# Altium PCB PCB4B4.PcbDoc
Units mm, origin at the board's own origin, x right, y up, seen from the top; angles counter-clockwise.
Board outline 66.42 x 80.14 mm, 2 copper layers (Top Layer, Bottom Layer); 59 components, 64 nets, 251 pads, 31 vias.
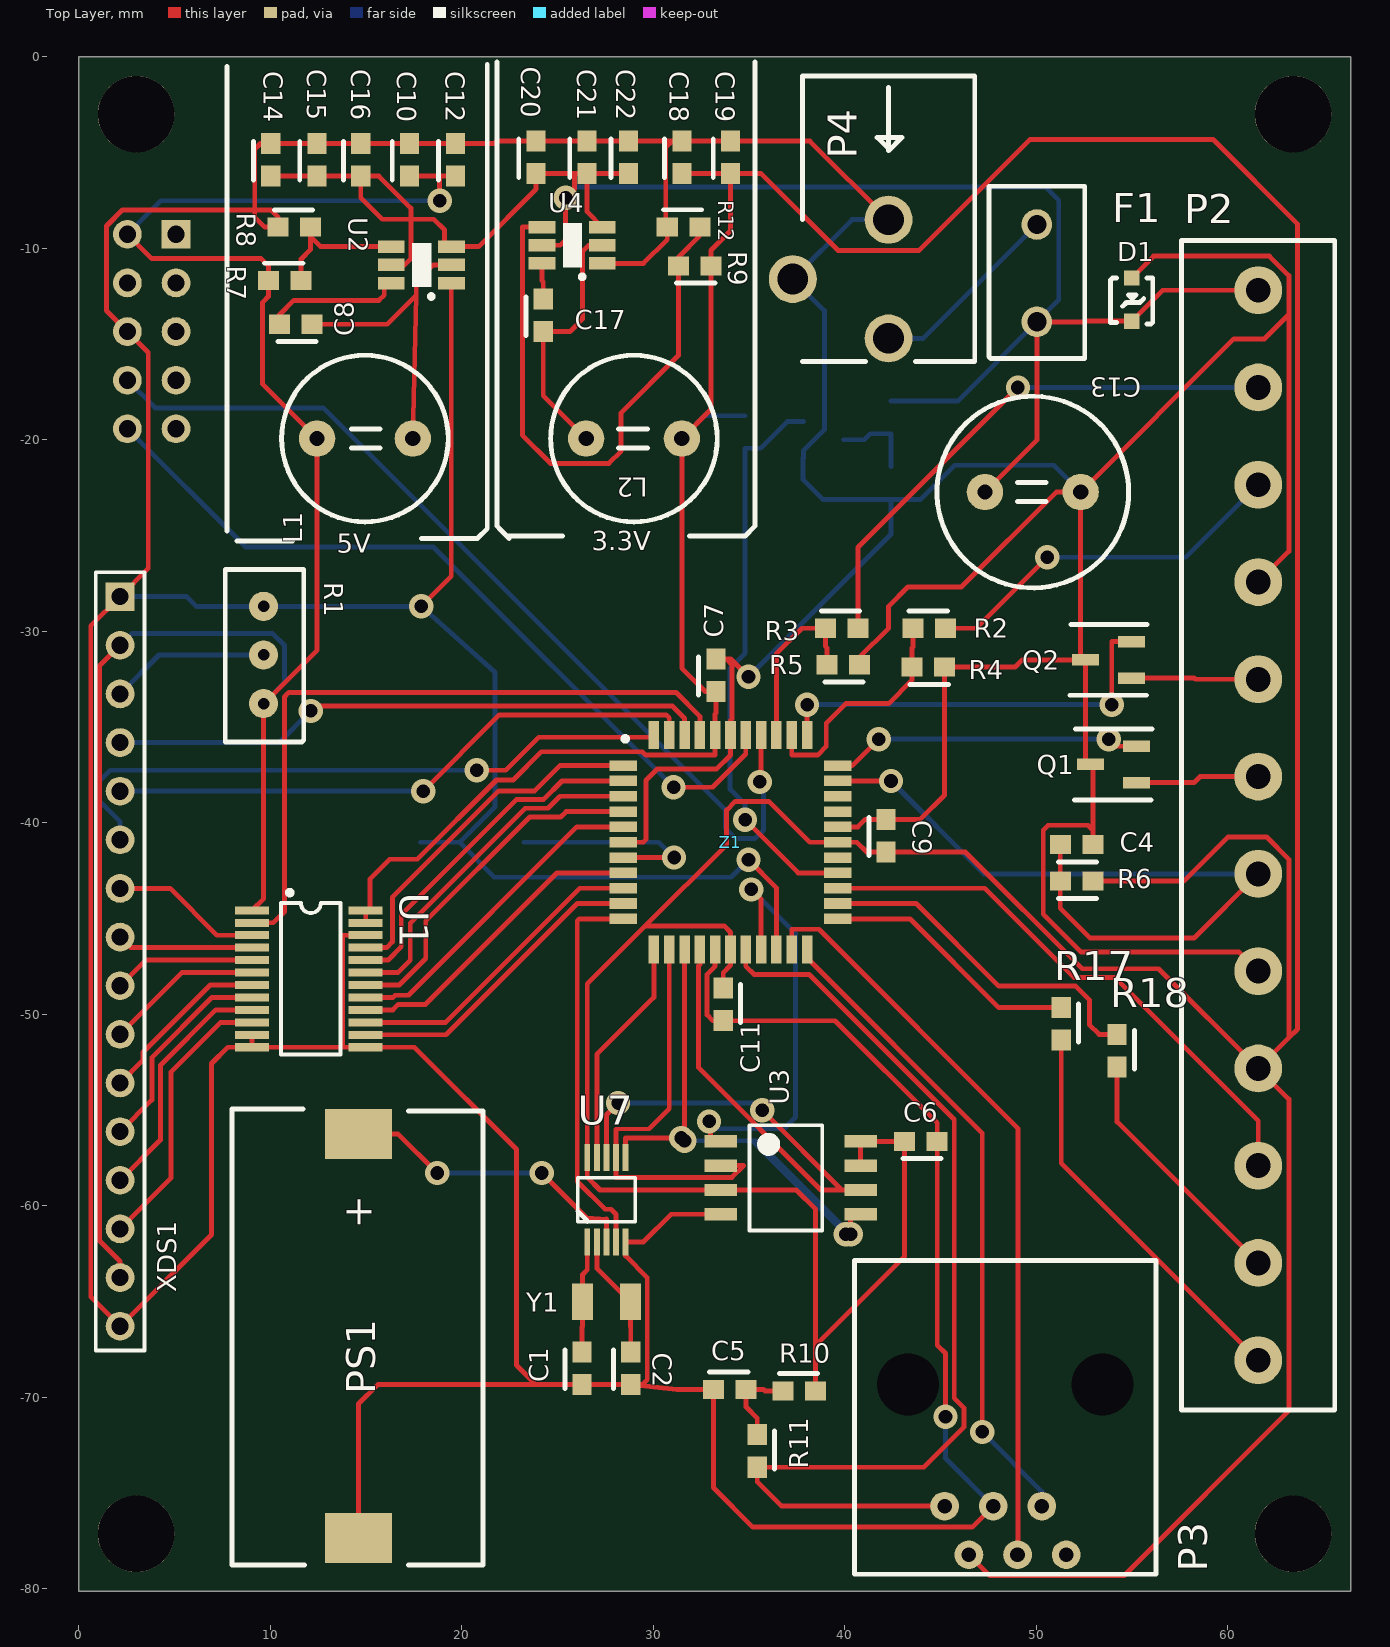
[diagram p0: Top Layer view]
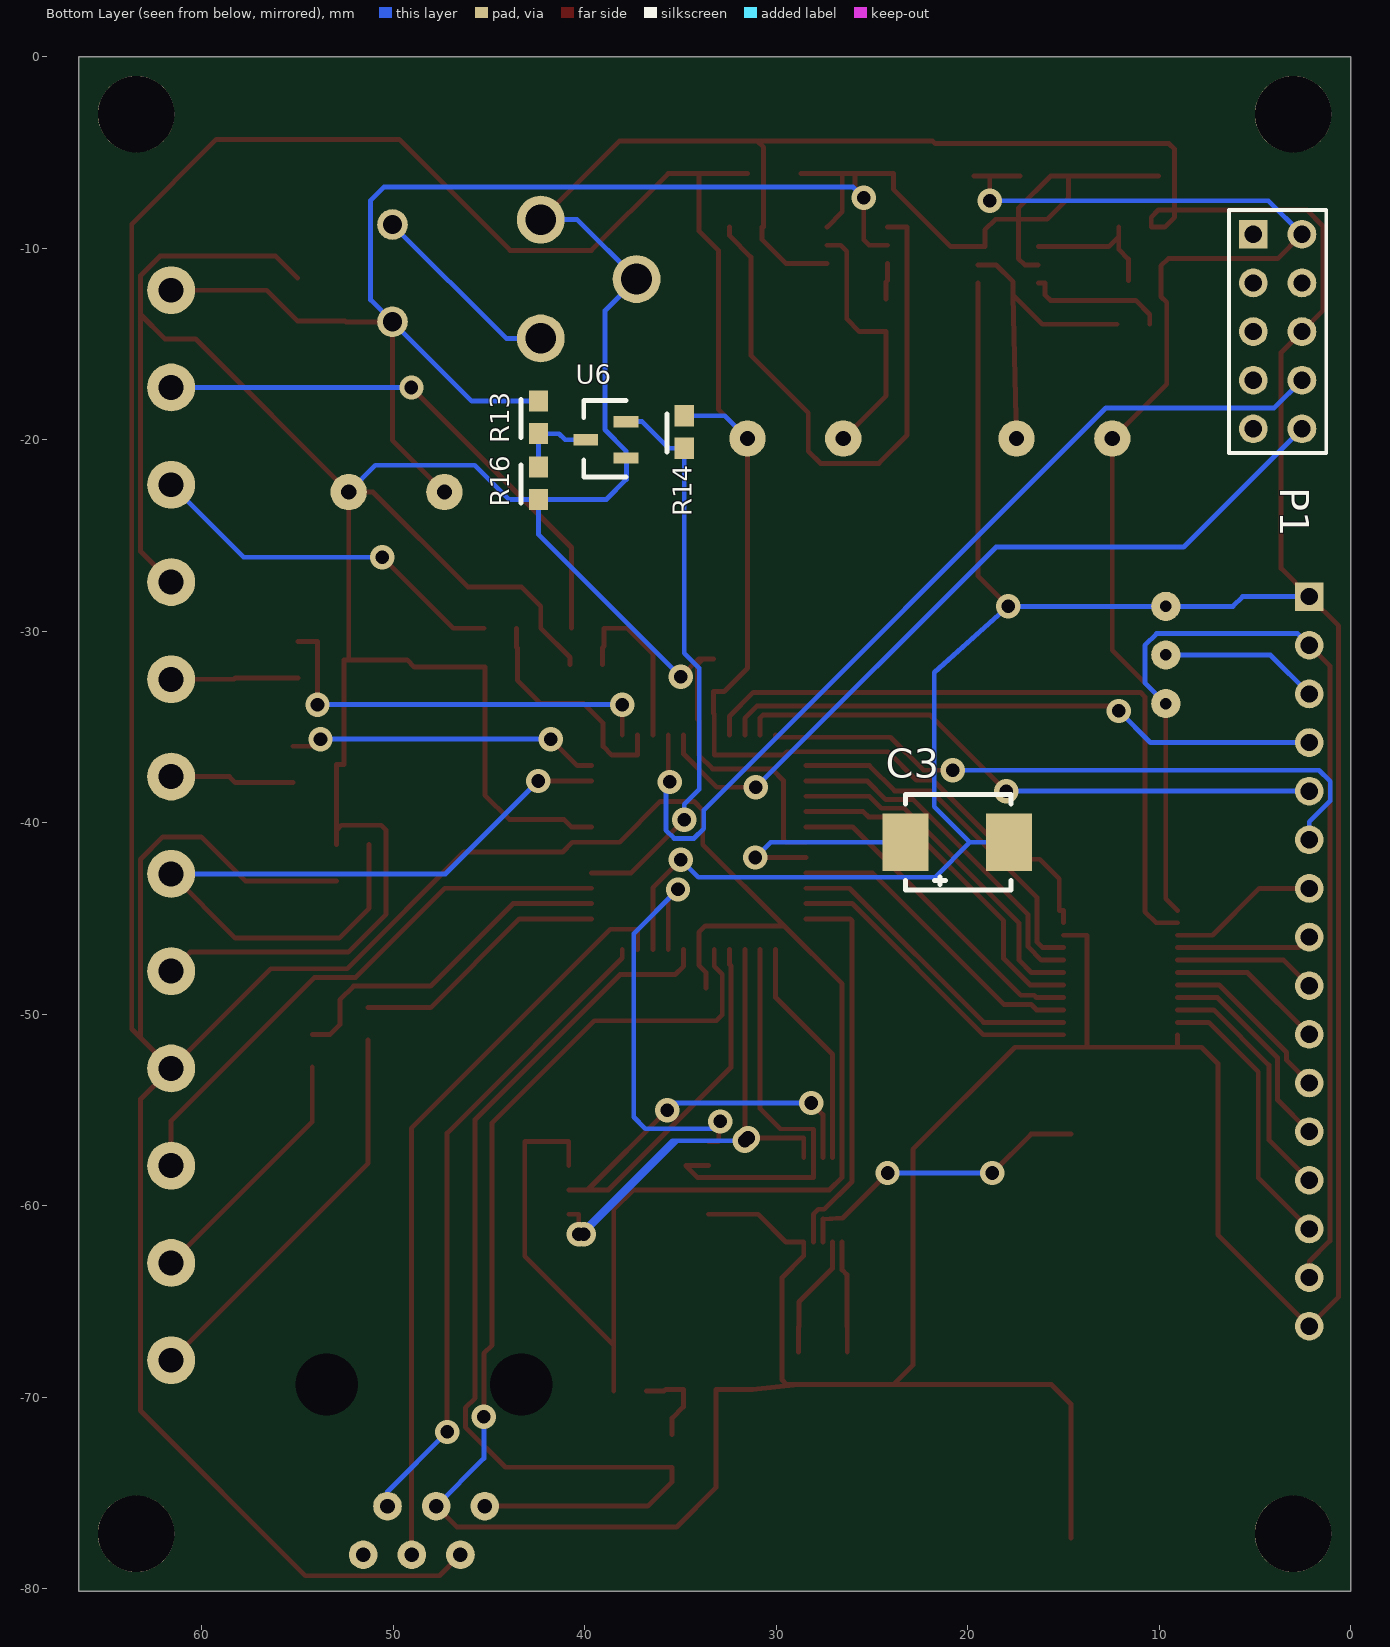
[diagram p1: Bottom Layer view, seen from below]

## Layer stack, top to bottom
Top Solder: solder mask 0.0102, Solder Resist, Dk 3.5
Top Layer: signal copper 0.0356
Dielectric 1: dielectric 0.32, FR-4, Dk 4.8
Bottom Layer: signal copper 0.0356
Bottom Solder: solder mask 0.0102, Solder Resist, Dk 3.5

## Board outline
0,-80.137 66.421,-80.137 66.421,0 0,0

## Design rules (kind name [scope] priority, off if disabled: settings)
Clearance [All] p1: gap=0.2
HoleSize [All] p1: absolutevalues=TRUE maxlimit=2.54 minlimit=0.2 maxpercent=80.000 minpercent=20.000
PolygonConnect [All] p1: connectstyle=Relief reliefconductorwidth=0.254 reliefentries=4 polygonreliefangle="90 Angle" airgapwidth=0.254
RoutingVias [All] p1: holewidth=0.711 width=1.27 viastyle="Through Hole" minholewidth=0.711 minwidth=1.27 maxholewidth=0.711 maxwidth=1.27
SilkToSilkClearance [All] p1: silktosilkclearance=0.1
SilkToSolderMaskClearance [IsPad] p1: minsilkscreentomaskgap=0.1 clearancetoexposedcopper=TRUE
SolderMaskExpansion [All] p1: expansion=0.102
UnpouredPolygon [All] p1: allowunpoured=FALSE
Width [All] p1: maxlimit=10 minlimit=0.254 preferedwidth=0.254
26 further rules are at their usual default settings.

## Classes and differential pairs
component class Ecran: R1 U1 XDS1
component class OTHER: P1 P2 Q1 Q2 R2 R3 R4 R5 R17 R18
component class PIC: C1 C2 C3 C4 C5 C6 C7 C9 C11 P3 R6 R10 R11 U3 U7 Y1 Z1
component class Power: 1 C8 C10 C12 C13 C14 C15 C16 C17 C18 C19 C20 C21 C22 D1 F1 L1 L2 P4 PS1 R7 R8 R9 R12 R13 R14 R16 U2 U4 U6
component class VRAIMENTHORSPCB: * B1 D4 DS1 MCL039PURGW P5
net class RG_LED[0..1]: RG_LED0 RG_LED1
net class S_D[0..7]: S_D0 S_D1 S_D2 S_D3 S_D4 S_D5 S_D6 S_D7

## Components (designator, comment, footprint, x,y, rotation, side; value= is the part's Value field where it differs from the comment)
C1 "18pF" 0603 26.289,-69.342 r90 top
C2 "18pF" 0603 28.829,-69.342 r90 top
C3 "10uF" C3 23.241,-41.021 r180 bottom
C4 "100nF" 0603 52.959,-41.148 r180 top
C5 "0.1uF" 0603 33.147,-69.596 r0 top
C6 "22uF" 0603 44.831,-56.642 r180 top
C7 "0.1uF" 0603 33.274,-33.147 r90 top
C8 "0.1uF" 0603 12.192,-13.97 r180 top
C9 "0.1uF" 0603 42.164,-41.529 r90 top
C10 "22uF" 0603 17.27,-6.231 r90 top
C11 "0.1uF" 0603 33.655,-48.641 r270 top
C12 "22uF" 0603 19.683,-6.231 r90 top
C13 "1000uF" Condo_trav 52.324,-22.733 r180 top
C14 "10uF" 0603 10.031,-6.231 r90 top
C15 "10uF" 0603 12.444,-6.231 r90 top
C16 "0.1uF" 0603 14.73,-6.231 r90 top
C17 "0.1uF" 0603 24.257,-14.351 r90 top
C18 "22uF" 0603 31.498,-6.104 r90 top
C19 "22uF" 0603 34.038,-6.104 r90 top
C20 "10uF" 0603 23.878,-6.104 r90 top
C21 "10uF" 0603 26.545,-6.104 r90 top
C22 "0.1uF" 0603 28.702,-6.104 r90 top
D1 "Diode 10TQ035" DiodeZin 54.991,-11.557 r270 top
F1 "Fuse 1" FUSIBLE 50.038,-8.763 r270 top
L1 "4.7uH" "Bobine Traversante 4.7" 12.446,-19.939 r0 top
L2 "3.3uH" "Bobine Traversante 4.7" 31.496,-19.939 r180 top
P1 "61304021121" HDR2X5 5.08,-9.271 r270 bottom
P2 "31101112" Bornier12 61.595,-68.072 r90 top
P3 "90512-001LF" RJ12 43.307,-69.342 r0 top
P4 "FC681465P" JackAlim 42.291,-8.509 r270 top
PS1 "Support Pile" Pile 14.605,-56.261 r270 top
Q1 "MOSFET-N" nouveau_mosfetN 52.832,-36.957 r90 top
Q2 "MOSFET-N" nouveau_mosfetN 52.578,-31.496 r90 top
R1 "20k" POTARD 9.652,-33.782 r90 top
R2 "300k" 0603 43.561,-29.845 r0 top
R3 "300k" 0603 38.989,-29.845 r0 top
R4 "100k" 0603 45.212,-31.877 r180 top
R5 "100k" 0603 40.767,-31.75 r180 top
R6 "330" 0603 52.959,-43.053 r180 top
R7 "54.9K" 0603 9.906,-11.684 r0 top
R8 "10K" 0603 10.412,-8.898 r0 top
R9 "33.2K" 0603 33.02,-10.922 r180 top
R10 "10K" 0603 36.781,-69.674 r0 top
R11 "1Ko" 0603 35.433,-71.96 r270 top
R12 "10K" 0603 30.734,-8.89 r0 top
R13 "300k" 0603 42.418,-19.685 r90 bottom
R14 "330" 0603 34.798,-20.447 r90 bottom
R16 "100k" 0603 42.418,-23.114 r90 bottom
R17 "60.4" 0603 51.308,-49.657 r270 top
R18 "75" 0603 54.229,-51.054 r270 top
U1 "74LVX4245MTCX" TRANS 14.986,-44.577 r270 top
U2 "TPS562201DDCT" TPS562201DDCT 17.016,-11.819 r90 top
U3 "SST25VF016B-50-4C-S2AF-T" FLASH 33.528,-56.642 r0 top
U4 "TPS562201DDCT" TPS562201DDCT 24.892,-10.795 r90 top
U6 "LM809M3-3.08/NOPB" LM809 37.846,-20.955 r0 bottom
U7 "MCP79510-I/MS" rtc 27.559,-59.69 r90 top
XDS1 "1-826629-6" HDR1X16 2.159,-28.194 r270 top
Y1 "32.768kHz" QUARTZ32KHz 27.559,-65.024 r0 top
Z1 "PIC32MX170F256D-I/PT" TQFP-44_L 34.036,-41.021 r0 top

## Footprints (in the part's own frame and the unit in brackets; to place one, negate y for a bottom-side part, rotate by r counter-clockwise, add the part's x,y. Pads: shape width x height; smd on the part's side, far side on the other; paste and mask are expansions set on the pad)
0603 [mm] "Chip Inductor, Body 0.6x0.3mm, IPC High Density"
  rect 1.1x1 smd: 1(0,0) 2(1.7,0)
  silkscreen extent -0.2,0.9 1.8,0.9
"Bobine Traversante 4.7" [mm]
  round 1.9 hole 0.8: 1(0,0) 2(5,0)
  silkscreen extent -1.85,-4.35 6.85,4.35
Bornier12 [mm]
  round 2.5 hole 1.3: 1(0,0) 2(5.08,0) 3(10.16,0) 4(15.24,0) 5(20.32,0) 6(25.4,0) 7(30.48,0) 8(35.56,0) 9(40.64,0) 10(45.72,0) 11(50.8,0) 12(55.88,0)
  silkscreen extent -2.6,-4 58.48,4
C3 [mm]
  rect 2.4x3 smd: 1(0,0) 2(5.4,0)
  silkscreen extent 0,-2.5 5.5,2.5
Condo_trav [mm]
  round 1.9 hole 0.8: 1(0,0) 2(5,0)
  silkscreen extent -2.5,-5 7.5,5
DiodeZin [mm]
  rect 0.8x0.8 smd: 1(2.25,0) 3(0,0)
  silkscreen extent 0,-1.1 2.4,1.1
FLASH [mm] "8-Pin Plastic Medium Body Small Outline Package 1.27 mm Pitch, IPC Medium Density"
  rect 1.7x0.65 smd: 1(0,0) 2(0,-1.27) 3(0,-2.54) 4(0,-3.81) 5(7.3,-3.81) 6(7.3,-2.54) 7(7.3,-1.27) 8(7.3,0)
  silkscreen extent 1.5,-4.66 5.3,0.85
FUSIBLE [mm]
  round 1.6 hole 1: 1(0,0) 2(5.08,0)
  silkscreen extent -2,-2.5 7,2.5
HDR1X16 [mm] "Connector; Header; 16 Position"
  rect 1.5x1.5 hole 0.9: 1(0,0)
  round 1.5 hole 0.9: 2(2.54,0) 3(5.08,0) 4(7.62,0) 5(10.16,0) 6(12.7,0) 7(15.24,0) 8(17.78,0) 9(20.32,0) 10(22.86,0) 11(25.4,0) 12(27.94,0) 13(30.48,0) 14(33.02,0) 15(35.56,0) 16(38.1,0)
  silkscreen extent -1.27,-1.27 39.37,1.27
HDR2X5 [mm] "Connector; Header; 5x2 Position"
  rect 1.5x1.5 hole 0.9: 1(0,0)
  round 1.5 hole 0.9: 2(0,2.54) 3(2.54,0) 4(2.54,2.54) 5(5.08,0) 6(5.08,2.54) 7(7.62,0) 8(7.62,2.54) 9(10.16,0) 10(10.16,2.54)
  silkscreen extent -1.27,-1.27 11.43,3.81
JackAlim [mm]
  round 2.5 hole 1.6: 1(6.2,0) 2(3.1,-5) 3(0,0)
  silkscreen extent -7.5,-4.5 7.4,4.5
LM809 [mm]
  rect 1.3x0.6 smd: 1(0,0) 2(0,-1.9) 3(2.1,-0.95)
  silkscreen extent 0,-3 2.2,1
nouveau_mosfetN [mm]
  rect 0.6x1.4 smd: 1(-0.95,-2.4) 2(0.95,-2.4) 3(0,0)
  silkscreen extent -1.85,-3.22 1.85,0.82
Pile [mm]
  rect 2.6x3.5 smd: 1(0,0) 2(21.1,0)
  silkscreen extent -1.3,-6.6 22.5,6.5
POTARD [mil]
  round 60 hole 23.62: 1(0,0) 2(100,0) 3(200,0)
  silkscreen extent -79,-83 276,79
QUARTZ32KHz [mm]
  rect 1.1x1.9 smd: 1(-1.25,0) 2(1.25,0)
RJ12 [mm]
  round 1.524 hole 3.25 unplated: 0(0,0) 0(10.16,0)
  round 1.5 hole 0.762: 1(1.91,-6.35) 2(3.18,-8.89) 3(4.45,-6.35) 4(5.72,-8.89) 5(6.99,-6.35) 6(8.26,-8.89)
  silkscreen extent -2.8,-9.91 12.96,6.47
rtc [mm]
  rect 1.4x0.3 smd: 1(-2.2,1) 2(-2.2,0.5) 3(-2.2,0) 4(-2.2,-0.5) 5(-2.2,-1) 6(2.2,-1) 7(2.2,-0.5) 8(2.2,0) 9(2.2,0.5) 10(2.2,1)
  silkscreen extent -1.15,-1.5 1.15,1.5
TPS562201DDCT [mm]
  rect 0.65x1.4 smd: 1(0,-2.45) 2(0.95,-2.45) 3(1.9,-2.45) 4(1.9,0.7) 5(0.95,0.7) 6(0,0.7)
  silkscreen extent -0.8,-1.5 2.1,-0.4
TQFP-44_L [mm] "44-Pin Thin Quad Flat Pack 0.8 mm Pitch, 1.0/0.1 mm Lead Form, IPC High Density"
  rect 1.45x0.55 smd: 1(-5.6,4) 2(-5.6,3.2) 3(-5.6,2.4) 4(-5.6,1.6) 5(-5.6,0.8) 6(-5.6,0) 7(-5.6,-0.8) 8(-5.6,-1.6) 9(-5.6,-2.4) 10(-5.6,-3.2) 11(-5.6,-4) 23(5.6,-4) 24(5.6,-3.2) 25(5.6,-2.4) 26(5.6,-1.6) 27(5.6,-0.8) 28(5.6,0) 29(5.6,0.8) 30(5.6,1.6) 31(5.6,2.4) 32(5.6,3.2) 33(5.6,4)
  rect 0.55x1.45 smd: 12(-4,-5.6) 13(-3.2,-5.6) 14(-2.4,-5.6) 15(-1.6,-5.6) 16(-0.8,-5.6) 17(0,-5.6) 18(0.8,-5.6) 19(1.6,-5.6) 20(2.4,-5.6) 21(3.2,-5.6) 22(4,-5.6) 34(4,5.6) 35(3.2,5.6) 36(2.4,5.6) 37(1.6,5.6) 38(0.8,5.6) 39(0,5.6) 40(-0.8,5.6) 41(-1.6,5.6) 42(-2.4,5.6) 43(-3.2,5.6) 44(-4,5.6)
  silkscreen extent -5.62,5.28 -5.37,5.52
TRANS [mm] "Shrink Small Outline; 24 Leads; Body Width 4.4 mm; Pitch 0.65 mm"
  rect 0.42x1.78 smd: 1(0,-5.94) 2(0.65,-5.94) 3(1.3,-5.94) 4(1.95,-5.94) 5(2.6,-5.94) 6(3.25,-5.94) 7(3.9,-5.94) 8(4.55,-5.94) 9(5.2,-5.94) 10(5.85,-5.94) 11(6.5,-5.94) 12(7.15,-5.94) 13(7.15,0) 14(6.5,0) 15(5.85,0) 16(5.2,0) 17(4.55,0) 18(3.9,0) 19(3.25,0) 20(2.6,0) 21(1.95,0) 22(1.3,0) 23(0.65,0) 24(0,0)
  silkscreen extent -1.05,-4.42 7.53,-1.31

## Part data
C1 C2 C4 C5 C7 C9 C11 C13: library part Cap, "Capacitor"
C3: library part "Cap Pol1"
C6: library part Cap, "Cout_Reg_3.3v"
C8 C10 C12 C14 C15 C16 C17 C18 C19 C20 C21 C22: library part Cap, "Reg_5v"
D1: "Diode Zenner"
F1: "Fuse"
L1: library part Inductor, "L_Reg_5v"
L2: library part Inductor, "L_Reg_3v"
P1: library part "Header 5X2", "Header, 5-Pin, Dual row"
P2: library part "Header 12", "Header, 12-Pin"
P3: library part "Header 6", "PortRJ12_debug"
P4: library part FC68148S, "Power connector"
PS1: library part SMTU-1225-1-LF
Q1 Q2: "N-Channel MOSFET"
R1: library part RPot, "Potentiometer"
R2 R3 R4 R5 R6 R7 R8 R9 R10 R11 R12 R13 R14 R16 R17 R18: library part Res2, "Resistor"
U1: "Bus Transceiver"
U2 U4: "Reg 12V-5V"
U3: library part Memoire, "FLASH"
U6: "Voltage Monitor"
U7: library part MCP79510, "RTC"
XDS1: library part "Header 16", "Header, 16-Pin"
Y1: library part XTAL, "Crystal Oscillator"
Z1: library part PIC32_1, "PIC"

## Free pads (board coordinates)
  round 4 hole 4: 3(3,-77.137) 3(3,-3) 3(63.421,-77.137) 3(63.421,-3)

## Via types
v1: diameter 1.27, hole 0.711, Top Layer to Bottom Layer, 31 vias

## Nets (pads, with @x,y where several pads share a name; then routed paths per layer and width w, separated by ;. In a path a pad name is that pad's centre, name@x,y a point inside that pad or via, vN(x,y) a via of type N, cw(c..) or ccw(c..) an arc to the next point about the centre after c; other vN are vias at no path point)
5VDC: C10.1 C12.1 L1.1 P1.2 R1.1 R7.1 U1.1 XDS1.2 XDS1.15 | length 111.7
  Top Layer w0.254: XDS1.15 2.159,-62.916 1.082,-61.839 1.082,-31.811 XDS1.2 ; P1.2 3.81,-10.541 9.525,-10.541 9.906,-10.922 R7.1 9.906,-12.522 9.601,-12.827 9.601,-17.094 L1.1 12.446,-30.988 R1.1 9.652,-43.971 U1.1 ; C10.1 18.847,-6.231 ; v1(18.847,-7.518) 18.847,-6.231 ; C12.1 18.847,-6.231
  Bottom Layer w0.254: XDS1.2 2.769,-30.124 10.135,-30.124 10.744,-30.734 10.744,-32.69 R1.1 ; P1.2 4.293,-7.518 v1(18.847,-7.518)
12VDC: C13.2 C14.1 C15.1 C16.1 C20.1 C21.1 C22.1 D1.1 F1.2 P2.12 R13.2 U2.3 U2.5 U4.3 U4.5 | length 103.4
  Top Layer w0.254: C14.1 C15.1 C16.1 ; U2.5 17.018,-10.869 17.348,-10.539 17.348,-8.485 ; U4.5 25.146,-9.845 25.425,-9.566 v1(25.425,-7.366) 25.883,-6.909 25.883,-6.104 ; U4.3 26.545,-8.098 C21.1 ; C22.1 C21.1 ; C13.2 50.038,-20.019 F1.2 52.476,-13.843 52.512,-13.807 D1.1 56.606,-12.192 P2.12 ; C16.1 14.73,-7.366 15.849,-8.485 17.348,-8.485 ; C16.1 15.672,-6.231 17.348,-7.907 17.348,-8.485 ; 17.348,-8.485 18.542,-8.485 19.101,-9.044 19.101,-9.919 U2.3 20.879,-9.919 23.878,-6.92 C20.1 25.883,-6.104 ; 25.883,-6.104 C21.1
  Bottom Layer w0.254: v1(25.425,-7.366) 25.984,-6.807 50.495,-6.807 51.181,-7.493 51.181,-12.7 F1.2 45.896,-17.985 R13.2
CMD_SERVO: P2.3 Z1.25 | length 29.3
  Top Layer w0.254: Z1.25 47.307,-43.421 51.965,-48.079 54.102,-48.079 61.595,-55.572 P2.3
CR_DATA0_3V: R2.1 R4.2 Z1.35 | length 12.4
  Top Layer w0.254: Z1.35 37.236,-36.474 38.583,-36.474 39.04,-36.017 39.04,-34.798 40.056,-33.782 42.291,-33.782 43.512,-32.561 R4.2 43.512,-30.886 43.561,-30.837 R2.1
CR_DATA0_12V: P2.10 R2.2 | length 19.4
  Top Layer w0.254: R2.2 46.863,-29.845 v1(50.571,-26.137)
  Bottom Layer w0.254: v1(50.571,-26.137) 57.81,-26.137 P2.10
CR_DATA1_3V: R3.1 R5.2 Z1.36 | length 9.3
  Top Layer w0.254: Z1.36 36.436,-31.179 37.77,-29.845 R3.1 38.989,-30.783 39.067,-30.861 R5.2
CR_DATA1_12V: P2.11 R3.2 | length 28.6
  Top Layer w0.254: R3.2 40.689,-25.63 v1(49.047,-17.272)
  Bottom Layer w0.254: v1(49.047,-17.272) P2.11
CR_LED_G: Q2.2 Z1.34 | length 21.8
  Top Layer w0.254: Z1.34 v1(38.036,-33.833) ; v1(53.95,-33.833) 53.95,-30.546 Q2.2
  Bottom Layer w0.254: v1(38.036,-33.833) v1(53.95,-33.833)
CR_LED_G_CTRL: P2.8 Q2.1 | length 6.6
  Top Layer w0.254: Q2.1 58.242,-32.446 58.308,-32.512 P2.8
CR_LED_R: Q1.2 Z1.33 | length 16.3
  Top Layer w0.254: Z1.33 40.386,-37.021 v1(41.771,-35.636) ; v1(53.797,-35.636) 54.168,-36.007 Q1.2
  Bottom Layer w0.254: v1(41.771,-35.636) v1(53.797,-35.636)
CR_LED_R_CTRL: P2.7 Q1.1 | length 6.5
  Top Layer w0.254: Q1.1 58.242,-37.907 58.557,-37.592 P2.7
FLSH_CE: U3.1 Z1.19 | length 22.7
  Top Layer w0.254: v1(32.918,-55.601) 32.995,-55.677 32.995,-56.642 U3.1 ; v1(35.128,-43.485) 35.636,-43.993 Z1.19
  Bottom Layer w0.254: v1(32.918,-55.601) 32.918,-55.626 33.274,-55.982 36.83,-55.982 37.44,-55.372 37.44,-45.796 v1(35.128,-43.485)
GND: C1.1 C2.1 C3.2 C4.1 C5.1 C6.1 C7.2 C9.2 C10.2 C11.2 C12.2 C13.1 C14.2 C15.2 C16.2 C18.2 C19.2 C20.2 C21.2 C22.2 D1.3 P1.6 P2.5 P2.9 P3.3 P4.2 P4.3 PS1.2 Q1.3 Q2.3 R1.3 R4.1 R5.1 R8.1 R12.1 R16.1 U1.11 U1.12 U1.13 U1.22 U2.1 U3.4 U4.1 U6.1 U7.5 XDS1.1 XDS1.16 Z1.6 Z1.16 Z1.20 Z1.29 Z1.39 | length 525
  Top Layer w0.254: U1.11 U1.12 ; PS1.2 14.605,-70.358 15.621,-69.342 23.876,-69.342 ; U1.22 13.767,-45.877 13.767,-51.727 ; v1(17.882,-28.702) 19.456,-27.127 19.456,-11.819 U2.1 ; U4.1 29.489,-10.795 30.734,-9.55 R12.1 30.658,-8.89 30.658,-4.734 30.988,-4.404 ; Z1.6 29.489,-41.021 29.62,-40.891 29.62,-37.795 30.226,-37.189 33.322,-37.189 34.036,-36.474 Z1.39 34.036,-34.671 34.112,-34.595 34.112,-31.75 33.809,-31.447 ; U7.5 U7.5@28.559,-61.9 ; Z1.16 33.236,-47.498 32.817,-47.917 32.817,-50.038 33.12,-50.341 C11.2 39.495,-50.341 44.831,-55.677 C6.1 44.831,-67.285 45.263,-67.716 v1(45.263,-71.018) ; C7.2 33.809,-31.447 ; U3.4 30.937,-60.452 29.489,-61.9 U7.5@28.559,-61.9 ; v1(34.975,-41.935) 36.436,-43.396 Z1.20 ; v1(34.976,-32.385) 34.038,-31.447 33.809,-31.447 ; Z1.29 40.691,-40.221 41.083,-39.829 C9.2 43.942,-39.829 45.212,-38.559 R4.1 48.895,-31.877 49.276,-31.496 Q2.3@52.324,-31.496 ; R5.1 40.767,-31.369 42.291,-29.845 42.291,-28.702 43.307,-27.686 46.101,-27.686 51.054,-22.733 C13.1 ; P4.3 38.186,-4.404 C19.2 C18.2 30.988,-4.404 ; P3.3 46.665,-76.784 35.204,-76.784 33.147,-74.727 C5.1 31.242,-69.596 C2.1 ; C4.1 52.959,-40.386 ; D1.3 56.134,-10.414 62.179,-10.414 63.195,-11.43 63.195,-13.462 ; P2.5 60.604,-46.761 52.349,-46.761 50.368,-44.78 50.368,-40.386 50.622,-40.132 52.705,-40.132 52.959,-40.386 ; P2.9 63.195,-25.832 63.195,-13.462 ; U1.12 13.767,-51.727 ; U1.12 7.785,-51.727 6.934,-52.578 6.934,-61.519 XDS1.16 0.628,-64.763 0.628,-29.725 XDS1.1 3.632,-26.721 3.632,-15.443 P1.6 1.448,-13.259 1.448,-8.839 2.286,-8.001 9.195,-8.001 ; 9.195,-8.001 10.031,-8.001 10.412,-8.382 R8.1 9.711,-8.898 9.195,-8.382 9.195,-8.001 ; 9.195,-8.001 9.195,-4.826 9.49,-4.531 C14.2 C15.2 C16.2 C10.2 C12.2 21.692,-4.531 21.819,-4.404 C20.2 C21.2 C22.2 30.988,-4.404 ; 13.767,-51.727 U1.13 17.526,-51.727 22.86,-57.061 22.86,-68.326 23.876,-69.342 ; 23.876,-69.342 C1.1 C2.1 ; U7.5@28.559,-61.9 28.559,-62.62 29.693,-63.754 29.693,-69.088 29.439,-69.342 C2.1 ; Q2.3@52.324,-31.496 C13.1 ; Q2.3@52.324,-31.496 Q2.3 52.578,-36.957 Q1.3 52.959,-36.957 52.959,-40.386 ; C13.1 60.325,-14.732 61.925,-14.732 63.195,-13.462
  Bottom Layer w0.254: XDS1.1 5.639,-28.194 6.147,-28.702 R1.3 v1(17.882,-28.702) 21.742,-32.156 21.742,-39.167 19.888,-41.021 ; C3.2 19.888,-41.021 ; v1(34.975,-41.935) 34.061,-42.85 21.692,-42.85 19.888,-41.021 ; v1(34.976,-32.385) 42.418,-24.943 R16.1 ; P4.3 40.391,-8.509 P4.2 38.938,-13.256 38.938,-19.482 37.846,-20.574 U6.1 37.821,-20.955 37.821,-22.073 38.862,-23.114 R16.1 ; v1(45.263,-71.018) 45.263,-73.198 P3.3 ; C13.1 50.927,-21.336 45.745,-21.336 43.967,-23.114 R16.1
MCLR: P3.1 R11.2 Z1.18 | length 54.1
  Top Layer w0.254: Z1.18 34.836,-47.498 35.268,-47.93 38.151,-47.93 45.72,-55.499 45.72,-70.056 46.228,-70.564 46.228,-71.566 44.135,-73.66 R11.2 35.433,-74.422 36.703,-75.692 P3.1
NetC3_1: C3.1 Z1.7 | length 10.8
  Top Layer w0.254: Z1.7 v1(31.09,-41.821)
  Bottom Layer w0.254: C3.1 30.29,-41.021 v1(31.09,-41.821)
NetC5_2: C5.2 R10.1 R11.1 | length 4.6
  Top Layer w0.254: R11.1 35.433,-71.095 34.847,-70.509 C5.2 35.763,-69.596 35.841,-69.674 R10.1
NetC8_1: C8.1 L1.2 U2.2 | length 16.5
  Top Layer w0.254: C8.1 16.104,-13.97 17.628,-12.446 ; L1.2 17.628,-12.446 ; U2.2 18.519,-10.869 17.628,-11.76 17.628,-12.446
NetC8_2: C8.2 U2.6 | length 7.4
  Top Layer w0.254: C8.2 10.492,-13.462 11.229,-12.725 15.672,-12.725 15.951,-12.446 15.951,-11.819 U2.6
NetC17_1: C17.1 L2.2 U4.2 | length 13.5
  Top Layer w0.254: L2.2 24.257,-17.7 C17.1 25.654,-14.351 26.314,-13.691 26.314,-10.16 26.629,-9.845 U4.2
NetC17_2: C17.2 U4.6 | length 1.9
  Top Layer w0.254: U4.6 24.192,-11.695 24.257,-11.76 C17.2
NetF1_1: F1.1 P4.1 | length 10.2
  Bottom Layer w0.254: P4.1 44.092,-14.709 F1.1
NetP2_1: P2.1 R17.2 | length 21
  Top Layer w0.254: R17.2 51.308,-57.785 P2.1
NetP2_2: P2.2 R18.2 | length 13.3
  Top Layer w0.254: R18.2 54.229,-55.626 P2.2
NetR7_2: R7.2 R8.2 U2.4 | length 7.4
  Top Layer w0.254: R7.2 11.606,-10.566 12.112,-10.06 12.112,-9.398 ; R8.2 12.112,-9.398 ; U2.4 12.633,-9.919 12.112,-9.398
NetR9_2: R9.2 R12.2 U4.4 | length 31.3
  Top Layer w0.254: U4.4 23.165,-8.895 23.165,-19.761 24.638,-21.234 27.686,-21.234 28.321,-20.599 28.321,-18.595 31.32,-15.596 R9.2 31.32,-10.465 32.434,-9.351 R12.2
PGEC1: P3.5 Z1.22 | length 34.1
  Top Layer w0.254: Z1.22 38.036,-47.066 47.183,-56.213 v1(47.183,-71.816)
  Bottom Layer w0.254: v1(47.183,-71.816) 50.297,-74.93 P3.5
PGED1: P3.4 Z1.21 | length 39.5
  Top Layer w0.254: Z1.21 37.236,-45.568 38.659,-45.568 49.047,-55.956 49.047,-78.232 P3.4
PIC_RASPI_RXD: P1.8 Z1.37 | length 49
  Top Layer w0.254: v1(35.56,-37.871) 35.636,-37.795 Z1.37
  Bottom Layer w0.254: P1.8 3.988,-18.339 12.776,-18.339 33.782,-39.345 33.782,-40.31 34.29,-40.818 35.328,-40.818 35.76,-40.386 35.76,-38.071 v1(35.56,-37.871)
PIC_RASPI_TXD: P1.10 Z1.38 | length 41.8
  Top Layer w0.254: v1(31.064,-38.151) 33.096,-38.151 34.836,-36.411 Z1.38
  Bottom Layer w0.254: P1.10 8.712,-25.603 18.517,-25.603 v1(31.064,-38.151)
POT_CONTRASTE: R1.2 XDS1.3 | length 8.3
  Bottom Layer w0.254: XDS1.3 4.191,-31.242 R1.2
POWEROK: R14.1 U6.2 Z1.26 | length 29.7
  Top Layer w0.254: v1(34.798,-39.852) 37.567,-42.621 Z1.26
  Bottom Layer w0.254: v1(34.798,-39.852) 34.798,-39.044 34.014,-38.26 34.014,-31.931 34.798,-31.147 R14.1 35.611,-20.447 37.003,-19.055 U6.2
RG_LED0: R17.1 Z1.23 | length 13.6
  Top Layer w0.254: Z1.23 43.409,-45.021 48.045,-49.657 R17.1
RG_LED1: R18.1 Z1.24 | length 18.2
  Top Layer w0.254: Z1.24 43.738,-44.221 48.05,-48.533 52.07,-48.533 52.781,-49.244 52.781,-50.546 53.289,-51.054 R18.1
RTC_CS: U7.4 Z1.11 | length 20.2
  Top Layer w0.254: U7.4 28.059,-60.452 27.798,-60.191 27.485,-60.191 26.035,-58.74 26.035,-45.123 26.137,-45.021 Z1.11
RTC_MFP: U7.9 Z1.12 | length 12.1
  Top Layer w0.254: U7.9 27.059,-52.101 30.036,-49.124 Z1.12
S_D0: U1.21 Z1.1 | length 18.8
  Top Layer w0.254: U1.21 16.084,-46.527 16.383,-46.228 16.383,-43.891 21.935,-38.339 23.813,-38.339 25.13,-37.021 Z1.1
S_D1: U1.20 Z1.2 | length 18.3
  Top Layer w0.254: U1.20 16.149,-47.177 16.844,-46.482 16.844,-44.799 22.85,-38.793 24.267,-38.793 25.238,-37.821 Z1.2
S_D2: U1.19 Z1.3 | length 18.4
  Top Layer w0.254: U1.19 16.665,-47.827 17.314,-47.178 17.314,-45.246 23.313,-39.247 24.507,-39.247 25.132,-38.621 Z1.3
S_D3: U1.18 Z1.4 | length 18.4
  Top Layer w0.254: U1.18 16.739,-48.477 18.123,-47.093 18.123,-45.127 23.55,-39.701 25.175,-39.701 25.454,-39.421 Z1.4
S_D4: U1.17 Z1.5 | length 17.1
  Top Layer w0.254: U1.17 16.408,-49.127 16.523,-49.012 17.221,-49.012 26.012,-40.221 Z1.5
S_D5: U1.16 Z1.8 | length 16.4
  Top Layer w0.254: U1.16 16.402,-49.777 16.691,-49.488 18.109,-49.488 24.976,-42.621 Z1.8
S_D6: U1.15 Z1.9 | length 16.4
  Top Layer w0.254: U1.15 19.164,-50.427 26.17,-43.421 Z1.9
S_D7: U1.14 Z1.10 | length 16.3
  Top Layer w0.254: U1.14 19.178,-51.077 26.034,-44.221 Z1.10
S_E: XDS1.6 Z1.44 | length 33.5
  Top Layer w0.254: v1(20.777,-37.262) 22.301,-37.262 24.028,-35.535 30.036,-35.535 Z1.44
  Bottom Layer w0.254: XDS1.6 2.159,-39.954 1.067,-38.862 1.067,-37.846 1.651,-37.262 v1(20.777,-37.262)
S_RS: XDS1.4 Z1.42 | length 31.4
  Top Layer w0.254: v1(12.116,-34.163) 12.364,-33.915 31.007,-33.915 31.636,-34.544 Z1.42
  Bottom Layer w0.254: XDS1.4 10.465,-35.814 v1(12.116,-34.163)
S_RW: XDS1.5 Z1.43 | length 31.3
  Top Layer w0.254: v1(17.983,-38.354) 21.968,-34.369 30.683,-34.369 30.836,-34.522 Z1.43
  Bottom Layer w0.254: XDS1.5 v1(17.983,-38.354)
SPI_SCK: U3.6 U7.8 Z1.15 | length 34
  Top Layer w0.254: U7.8 27.559,-55.245 v1(28.165,-54.639) ; Z1.15 32.436,-47.396 32.36,-47.473 32.36,-52.781 38.76,-59.182 39.853,-59.182 ; v1(35.687,-55.016) 39.853,-59.182 ; U3.6 39.853,-59.182
  Bottom Layer w0.254: v1(28.165,-54.639) 35.309,-54.639 v1(35.687,-55.016)
SPI_SI: U3.2 U7.7 Z1.13 | length 22.1
  Top Layer w0.254: Z1.13 30.836,-54.94 29.794,-55.982 28.059,-56.013 U7.7 28.059,-58.522 34.112,-58.522 34.722,-57.912 U3.2
SPI_SO: U3.5 U7.6 Z1.14 | length 33.7
  Top Layer w0.254: U7.6 28.559,-56.464 v1(31.471,-56.464) ; v1(31.636,-56.607) Z1.14 ; v1(40.056,-61.493) v1@40.31,-61.239 ; v1(40.31,-61.493) v1@40.31,-61.239 ; U3.5 40.31,-60.452 v1@40.31,-61.239
  Bottom Layer w0.254: v1(31.471,-56.464) 31.613,-56.607 v1(31.636,-56.607) 35.169,-56.607 ; v1(40.056,-61.493) 35.169,-56.607 ; v1(40.31,-61.493) 35.423,-56.607 35.169,-56.607
STATUS_BTN: C4.2 P2.6 R6.2 Z1.32 | length 39.7
  Top Layer w0.254: Z1.32 v1(42.418,-37.821) ; C4.2 R6.2 51.259,-44.47 52.814,-46.025 58.242,-46.025 P2.6
  Bottom Layer w0.254: v1(42.418,-37.821) 47.269,-42.672 P2.6
TS_D0: U1.3 XDS1.7 | length 7.9
  Top Layer w0.254: XDS1.7 4.771,-43.434 7.214,-45.877 U1.3
TS_D1: U1.4 XDS1.8 | length 7.1
  Top Layer w0.254: XDS1.8 2.712,-46.527 U1.4
TS_D2: U1.5 XDS1.9 | length 7.4
  Top Layer w0.254: XDS1.9 3.496,-47.177 U1.5
TS_D3: U1.6 XDS1.10 | length 8.2
  Top Layer w0.254: XDS1.10 5.386,-47.827 U1.6
TS_D4: U1.7 XDS1.11 | length 9.2
  Top Layer w0.254: XDS1.11 3.345,-52.408 3.345,-52.002 6.87,-48.477 U1.7
TS_D5: U1.8 XDS1.12 | length 11.1
  Top Layer w0.254: XDS1.12 3.817,-54.476 3.817,-52.266 6.956,-49.127 U1.8
TS_D6: U1.9 XDS1.13 | length 12.9
  Top Layer w0.254: XDS1.13 4.271,-56.562 4.271,-52.662 7.156,-49.777 U1.9
TS_D7: U1.10 XDS1.14 | length 14.6
  Top Layer w0.254: XDS1.14 4.826,-58.547 4.826,-53.01 7.409,-50.427 U1.10
TS_TR: U1.2 Z1.41 | length 36.4
  Top Layer w0.254: U1.2 10.16,-45.227 10.744,-44.643 10.744,-33.426 10.973,-33.198 31.191,-33.198 32.436,-34.442 Z1.41
U6_VCC: R13.1 R16.2 U6.3 | length 4.3
  Bottom Layer w0.254: U6.3 41.021,-20.005 41.341,-19.685 R13.1 R16.2
VBAT: PS1.1 U7.3 | length 16
  Top Layer w0.254: PS1.1 16.688,-56.261 v1(18.72,-58.293) ; v1(24.181,-58.293) 26.533,-60.645 27.559,-60.706 U7.3
  Bottom Layer w0.254: v1(18.72,-58.293) v1(24.181,-58.293)
VOUT3.3: C6.2 C7.1 C9.1 C11.1 C18.1 C19.1 L2.1 P2.4 P3.2 R6.1 R9.1 R10.2 R14.2 U1.23 U1.24 U3.3 U3.7 U3.8 U7.10 Z1.17 Z1.28 Z1.40 | length 304.7
  Top Layer w0.254: U1.23 U1.24 15.215,-44.577 15.215,-42.926 16.234,-41.907 17.682,-41.907 21.819,-37.77 22.682,-37.77 24.155,-36.297 29.439,-36.297 29.616,-36.474 33.236,-36.474 Z1.40 33.236,-34.315 33.274,-34.277 C7.1 32.715,-33.147 31.496,-31.928 L2.1 33.02,-18.415 R9.1 33.02,-10.109 34.038,-9.091 C19.1 ; C18.1 C19.1 ; C11.1 33.655,-47.828 34.036,-47.447 Z1.17 34.036,-45.72 33.706,-45.39 29.591,-45.39 ; R10.2 38.481,-67.286 ; U3.7 U3.8 C6.2 43.131,-62.636 38.481,-67.286 ; P3.2 47.579,-79.324 54.585,-79.324 63.195,-70.714 63.195,-54.432 P2.4 ; R6.1 57.709,-43.053 60.02,-40.742 62.027,-40.742 63.195,-41.91 63.195,-51.232 ; 29.591,-45.39 33.833,-41.148 33.833,-39.345 34.29,-38.887 36.043,-38.887 38.176,-41.021 Z1.28 40.64,-41.021 41.148,-41.529 C9.1 46.304,-41.529 52.4,-47.625 56.388,-47.625 P2.4 ; 29.591,-45.39 26.559,-48.422 U7.10 26.559,-58.522 27.219,-59.182 U3.3 37.465,-59.182 38.481,-60.198 38.481,-67.286 ; C19.1 35.644,-6.104 39.649,-10.109 43.891,-10.109 49.682,-4.318 59.233,-4.318 63.652,-8.738 63.652,-50.775 63.195,-51.232 ; P2.4 63.195,-51.232
  Bottom Layer w0.254: L2.1 32.688,-18.747 R14.2
X1: C1.2 U7.1 Y1.1 | length 5.9
  Top Layer w0.254: C1.2 26.289,-66.345 26.309,-66.325 Y1.1 26.309,-63.602 26.559,-63.352 U7.1
X2: C2.2 U7.2 Y1.2 | length 6.5
  Top Layer w0.254: U7.2 27.059,-63.274 Y1.2 28.809,-66.325 28.829,-66.345 C2.2
pads on no net: P1.1 P1.3 P1.4 P1.5 P1.7 P1.9 P3.0 P3.6 Z1.27 Z1.30 Z1.31

## Silkscreen, mask and mechanical layers (free items; w line width, h text height)
Top Overlay:
  lines w0.254: 7.745,-24.773 7.745,-0.516 ; 8.253,-25.281 11.174,-25.281 ; 17.905,-25.154 20.826,-25.154 21.334,-24.646 21.334,-0.389 ; 21.846,-0.262 21.846,-24.519 22.354,-25.027 25.275,-25.027 ; 21.971,-24.654 22.479,-25.162 ; 31.879,-25.027 34.8,-25.027 35.308,-24.519 35.308,-0.262
  text "3.3V" at 26.797,-25.781 h1
  text "5V" at 13.462,-25.908 h1

## Text inside footprints (layer, text, board x,y; h text height)
PS1: Top Overlay "+" at 14.005,-59.461 h1.52 r270